# Altium PCB CH634X-USB-Hub.PcbDoc
Units mil, origin at the board's own origin, x right, y up, seen from the top; angles counter-clockwise.
Board outline 669 x 2204 mil, 2 copper layers (Top Layer, Bottom Layer); 90 components, 98 nets, 333 pads, 0 vias.
Unrouted connection lines stored in the file: 230.
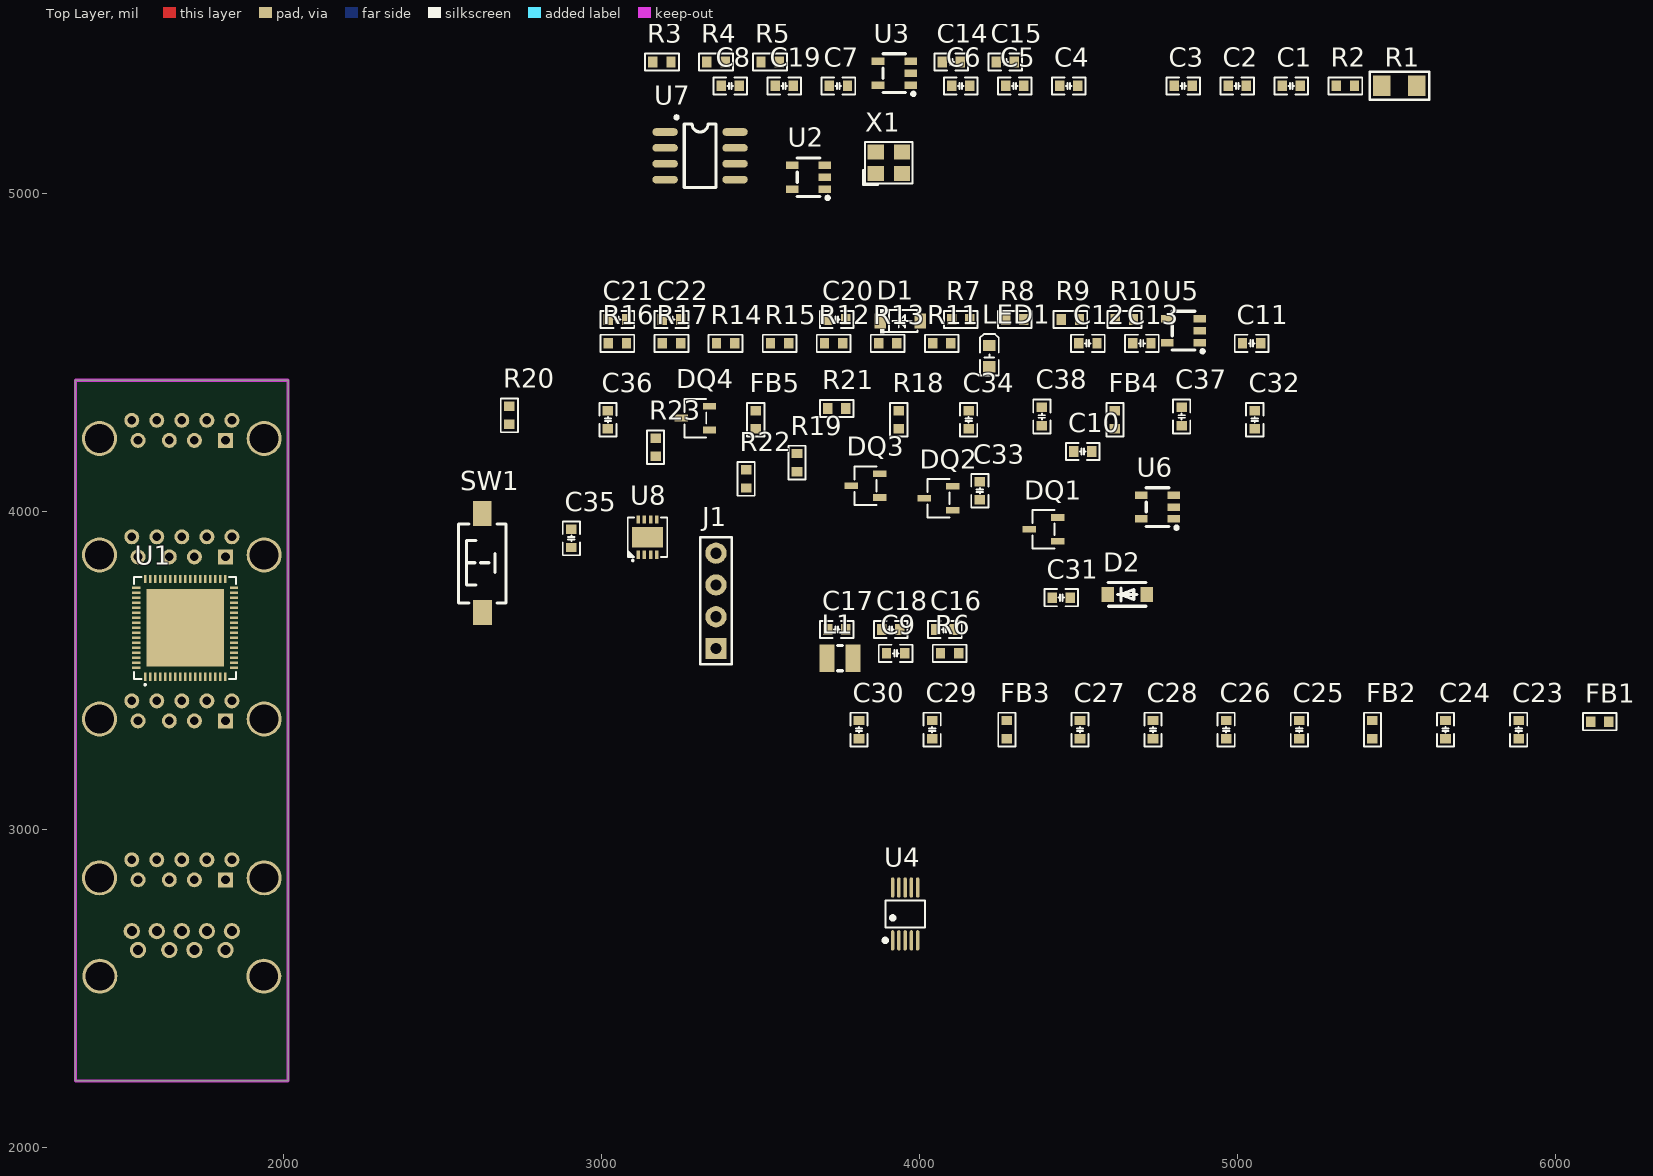
[diagram p0: Top Layer view]
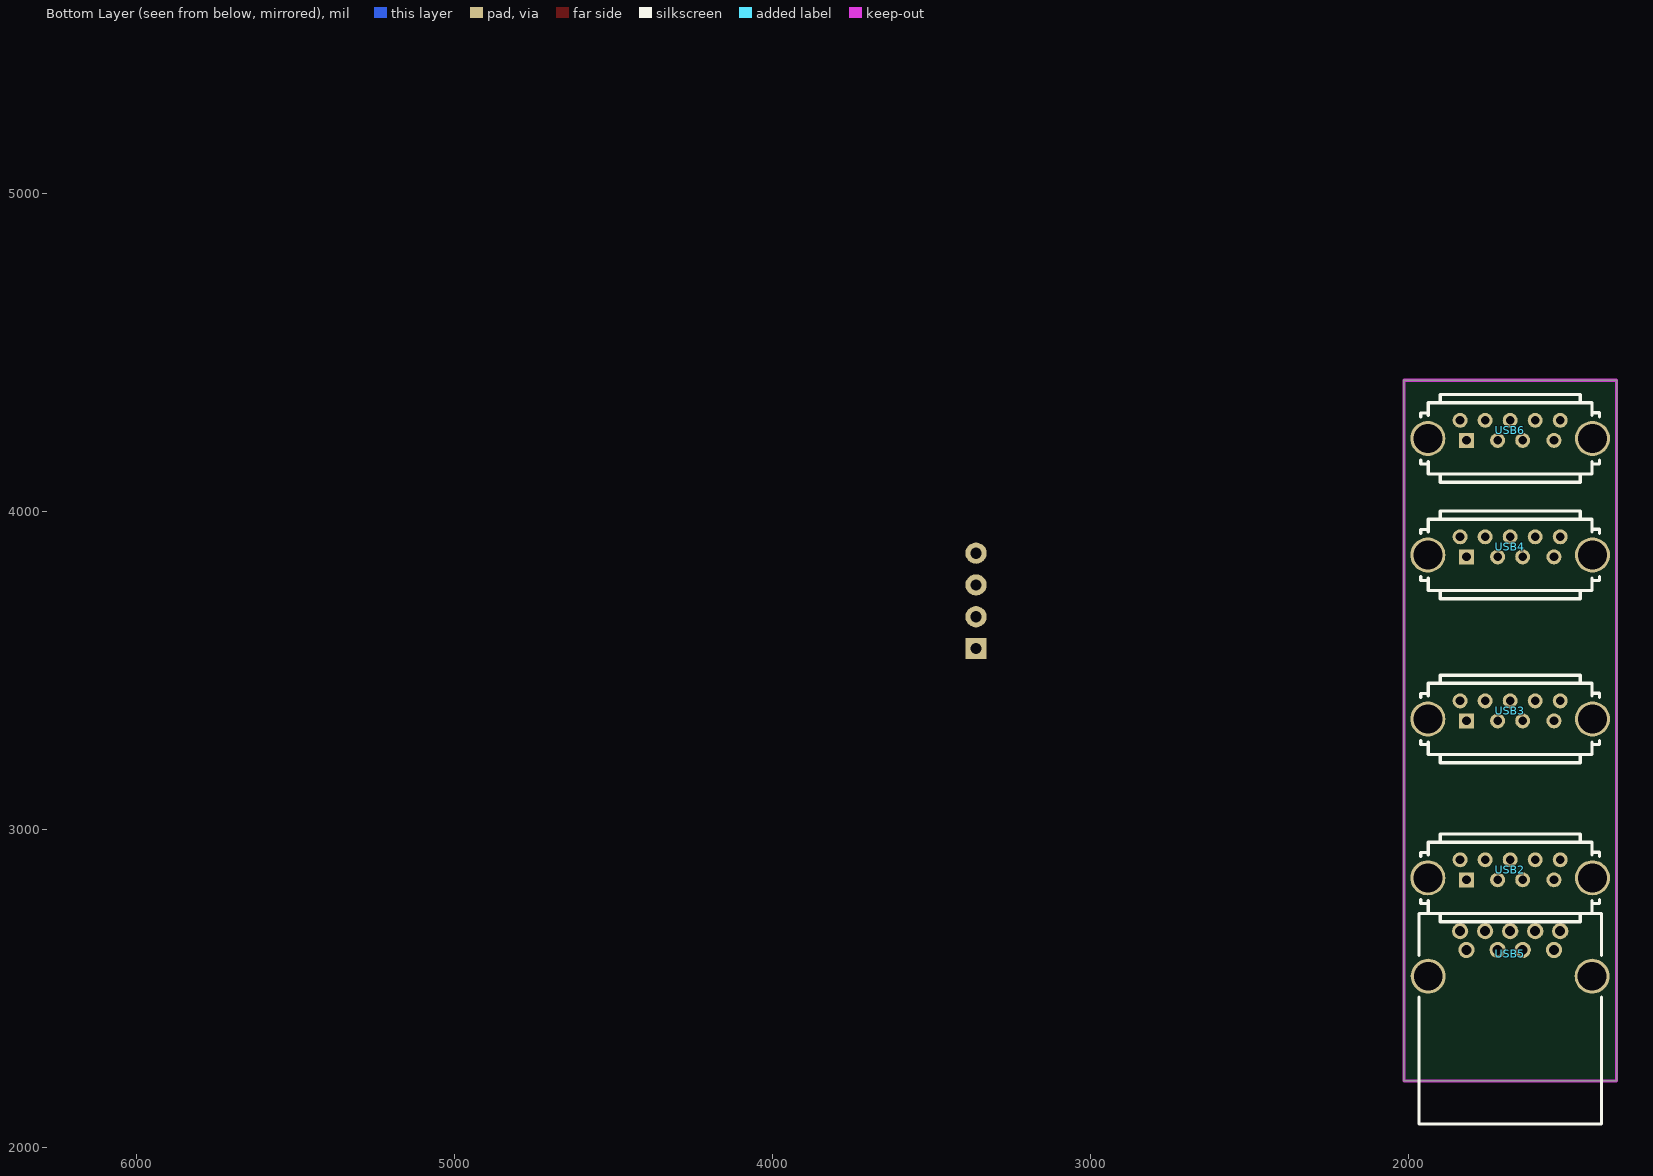
[diagram p1: Bottom Layer view, seen from below]

## Layer stack, top to bottom
Top Solder: solder mask 0.4, Solder Resist, Dk 3.5
Top Layer: signal copper 1.4
Dielectric 1: dielectric 12.6, FR-4, Dk 4.8
Bottom Layer: signal copper 1.4
Bottom Solder: solder mask 0.4, Solder Resist, Dk 3.5

## Board outline
1345,2210 2014,2210 2014,4414 1345,4414

## Design rules (kind name [scope] priority, off if disabled: settings)
Clearance [All] p1: gap=10 ignorepadtopadclearanceinfootprint=TRUE except(0: Arc-Hole Track-Hole SMDPad-Hole THPad-Hole Via-Hole Fill-Hole Poly-Hole Region-Hole Text-Hole)
PolygonConnect [All] p1: connectstyle=Relief reliefconductorwidth=10 reliefentries=4 polygonreliefangle="90 Angle" airgapwidth=10
RoutingVias [All] p1: holewidth=28 width=50 viastyle="Through Hole" minholewidth=28 minwidth=50 maxholewidth=28 maxwidth=50
SolderMaskExpansion [All] p1: expansion=4 istentingtop=FALSE
Width [All] p1: maxlimit=10 minlimit=10 preferedwidth=10
30 further rules are at their usual default settings.

## Components (designator, comment, footprint, x,y, rotation, side; value= is the part's Value field where it differs from the comment)
C1 "100nF 10% 50V" C0603_L 5170,5340 r0 top
C2 "100nF 10% 50V" C0603_L 5000,5340 r0 top
C3 "100nF 10% 50V" C0603_L 4830,5340 r0 top
C4 "100nF 10% 50V" C0603_L 4470,5340 r0 top
C5 "100nF 10% 50V" C0603_L 4300,5340 r0 top
C6 "20pF 5% 50V" C0603_L 4130,5340 r0 top
C7 "20pF 5% 50V" C0603_L 3745,5340 r0 top
C8 "1uF 10% 6.3V" C0603_L 3405,5340 r0 top
C9 "10uF 10% 6.3V" C0603_L 3925,3555 r0 top
C10 "100nF 10% 50V" C0603_L 4513.54,4190 r0 top
C11 "10uF 10% 6.3V" C0603_L 5045,4530 r0 top
C12 "100nF 10% 50V" C0603_L 4530,4530 r0 top
C13 "10uF 10% 6.3V" C0603_L 4700,4530 r0 top
C14 "10uF 10% 6.3V" C0603_L 4100,5415 r0 top
C15 "10uF 10% 6.3V" C0603_L 4270,5415 r0 top
C16 "10uF 10% 6.3V" C0603_L 4080,3630 r0 top
C17 "10uF 10% 6.3V" C0603_L 3740,3630 r0 top
C18 "10uF 10% 6.3V" C0603_L 3910,3630 r0 top
C19 "100nF 10% 50V" C0603_L 3575,5340 r0 top
C20 "100nF 10% 50V" C0603_L 3740,4605 r0 top
C21 "10uF 10% 6.3V" C0603_L 3050,4605 r0 top
C22 "100nF 10% 50V" C0603_L 3220,4605 r0 top
C23 "100nF 10% 50V" C0603_L 5885,3315 r90 top
C24 "100nF 10% 50V" C0603_L 5655,3315 r90 top
C25 "100nF 10% 50V" C0603_L 5195,3315 r90 top
C26 "100nF 10% 50V" C0603_L 4965,3315 r90 top
C27 "10uF 10% 6.3V" C0603_L 4505,3315 r90 top
C28 "10uF 10% 6.3V" C0603_L 4735,3315 r90 top
C29 "100nF 10% 50V" C0603_L 4040,3315 r90 top
C30 "100nF 10% 50V" C0603_L 3810,3315 r90 top
C31 "10uF 10% 6.3V" C0603_L 4446.46,3730 r0 top
C32 "10uF 10% 6.3V" C0603_L 5055,4290 r90 top
C33 "100nF 10% 50V" C0603_L 4190,4066.46 r90 top
C34 "100nF 10% 50V" C0603_L 4155,4290 r90 top
C35 "100nF 10% 50V" C0603_L 2905,3916.46 r90 top
C36 "100nF 10% 50V" C0603_L 3020,4290 r90 top
C37 "100nF 10% 50V" C0603_L 4825,4300 r90 top
C38 "100nF 10% 50V" C0603_L 4385,4300 r90 top
D1 "SM4007PL" SOD-123FL 3940,4600 r0 top
D2 "SMFJ6.0CA" SOD-123F_L2.8-W1.8-LS3.7-RD 4653.98,3740 r0 top
DQ1 "S8050" SOT-23-3_L2.9-W1.6-P1.90-LS2.8-BR 4390,3945 r0 top
DQ2 "S8050" SOT-23-3_L2.9-W1.6-P1.90-LS2.8-BR 4060.32,4042.6 r0 top
DQ3 "S8050" SOT-23-3_L2.9-W1.6-P1.90-LS2.8-BR 3830.32,4082.4 r0 top
DQ4 "S8050" SOT-23-3_L2.9-W1.6-P1.90-LS2.8-BR 3295,4295 r0 top
FB1 "120R@100MHz" FB0603 6140,3340 r0 top
FB2 "120R@100MHz" FB0603 5425,3315 r90 top
FB3 "120R@100MHz" FB0603 4275,3315 r90 top
FB4 "120R@100MHz" FB0603 4615,4290 r90 top
FB5 "120R@100MHz" FB0603 3485,4290 r90 top
J1 "2.54mm 4P" HDR2.54-LI-4P 3360,3720 r90 top
L1 "ftc252012s100mbca" IND-SMD_L2.5-W2.0 3750,3540 r0 top value=10uH
LED1 "蓝色" LED0603-FD 4220,4490 r90 top
R1 "33mR 1%" R1206_L 5510,5340 r0 top
R2 "5.1k 5%" R0603_L 5340,5340 r0 top
R3 "6.8k 1%" R0603_L 3190,5415 r0 top
R4 "5.1k 5%" R0603_L 3360,5415 r0 top
R5 "6.8k 1%" R0603_L 3530,5415 r0 top
R6 "5.1k 5%" R0603_L 4095,3555 r0 top
R7 "6.8k 1%" R0603_L 4130,4605 r0 top
R8 "NC" R0603_L 4300,4605 r0 top
R9 "6.8k 1%" R0603_L 4475,4605 r0 top
R10 "5.1k 5%" R0603_L 4645,4605 r0 top
R11 "10k 5%" R0603_L 4070,4530 r0 top
R12 "5.1k 5%" R0603_L 3730,4530 r0 top
R13 "5.1k 5%" R0603_L 3900,4530 r0 top
R14 "NC" R0603_L 3390,4530 r0 top
R15 "5.1k 5%" R0603_L 3560,4530 r0 top
R16 "5.1k 5%" R0603_L 3050,4530 r0 top
R17 "5.1k 5%" R0603_L 3220,4530 r0 top
R18 "0R 5%" R0603_L 3935,4290 r90 top
R19 "0R 5%" R0603_L 3615,4155 r90 top
R20 "NC" R0603_L 2710,4303.54 r90 top
R21 "5.1k 5%" R0603_L 3740,4325 r0 top
R22 "5.1k 5%" R0603_L 3455,4103.54 r90 top
R23 "5.1k 5%" R0603_L 3170,4203.54 r90 top
SW1 "ts-1088-ar02016" "SW SMD-3*6*2.5" 2625,3840 r90 top
U1 "ch634x_c48985831" QFN-68_L8.0-W8.0-P0.40-BL-EP6.2 1690,3635 r0 top
U2 "MT9700" SOT-23-5_L3.0-W1.7-P0.95-LS2.8-BR 3650.32,5052.6 r0 top
U3 "MT9700" SOT-23-5_L3.0-W1.7-P0.95-LS2.8-BR 3920,5380 r0 top
U4 "ina226aidgsr" MSOP-10_L3.0-W3.0-P0.50-LS5.0-BL 3955,2735 r0 top
U5 "MT9700" SOT-23-5_L3.0-W1.7-P0.95-LS2.8-BR 4830,4570 r0 top
U6 "MT9700" SOT-23-5_L3.0-W1.7-P0.95-LS2.8-BR 4747.94,4015 r0 top
U7 "CH340N" SOP8 3201,5196 r0 top
U8 "stc8g1k08-36i-dfn8" DFN-8_L3.0-W3.0-P0.50-BL-EP 3144.5,3920.4 r0 top
USB2 "hc-usb3.0-l130-wj" USB-A-TH_USB-A-TH_HC-USB3.0-L115-WJ 1679.5,2874 r180 bottom locked
USB3 "hc-usb3.0-l130-wj" USB-A-TH_USB-A-TH_HC-USB3.0-L115-WJ 1679.5,3374 r180 bottom locked
USB4 "hc-usb3.0-l130-wj" USB-A-TH_USB-A-TH_HC-USB3.0-L115-WJ 1679.5,3890 r180 bottom locked
USB5 "hc-usb3.0-l168-wj" USB-3.0-A-TH_HC-USB3.0-L168-WJ 1679.5,2610 r180 bottom locked
USB6 "hc-usb3.0-l130-wj" USB-A-TH_USB-A-TH_HC-USB3.0-L115-WJ 1679.5,4256.5 r180 bottom locked
X1 "24MHz/10ppm" OSC-3225-4P 3903.66,5098.46 r0 top

## Footprints (in the part's own frame and the unit in brackets; to place one, negate y for a bottom-side part, rotate by r counter-clockwise, add the part's x,y. Pads: shape width x height; smd on the part's side, far side on the other; paste and mask are expansions set on the pad)
C0603_L [mm] "贴片MLCC电容"
  rect 0.75x0.85 smd: 1(-0.725,0) 2(0.725,0)
  silkscreen extent -1.35,-0.69 1.35,0.69, body extent -0.8,-0.4 0.8,0.4, height 0.8
DFN-8_L3.0-W3.0-P0.50-BL-EP [mil]
  rect 11x26.2 smd: 1(-29.5,-55.4) 2(-9.8,-55.4) 3(9.8,-55.4) 4(29.5,-55.4) 5(29.5,55.4) 6(9.8,55.4) 7(-9.8,55.4) 8(-29.5,55.4)
  rect 96.5x65 smd: 9(0,0)
  silkscreen extent -62,-76 62,62
FB0603 [mm] "0603贴片磁珠"
  rect 0.75x0.85 smd: 1(-0.725,0) 2(0.725,0)
  silkscreen extent -1.35,-0.69 1.35,0.69, body extent -0.8,-0.4 0.8,0.4, height 0.8
HDR2.54-LI-4P [mm] "排针，4脚"
  rect 1.7x1.7 hole 0.9: 1(-3.81,0)
  round 1.7 hole 0.9: 2(-1.27,0) 3(1.27,0) 4(3.81,0)
  silkscreen extent -5.08,-1.27 5.08,1.27, body extent -5.08,-1.27 5.08,1.27, height 2.54
IND-SMD_L2.5-W2.0 [mil]
  rect 47.2x86.6 smd: 1(40.5,0) 2(-40.5,0)
  silkscreen extent -8,-40 8,40
LED0603-FD [mm]
  rect 0.9x1 smd: 1(-0.85,0) 2(0.85,0)
  silkscreen extent -1.55,-0.75 1.75,0.75
MSOP-10_L3.0-W3.0-P0.50-LS5.0-BL [mil]
  oval 11x63.8 smd: 1(-39.4,-83.1) 2(-19.7,-83.1) 3(0,-83.1) 4(19.7,-83.1) 5(39.4,-83.1) 6(39.4,83) 7(19.7,83) 8(0,83) 9(-19.7,83) 10(-39.4,83)
  silkscreen extent -69,-89 62,42
OSC-3225-4P [mm] "3.2*2.5*0.7mm(长宽高)                             淘宝ID:黄晶宝石"
  rect 1.3x1.2 smd: 1(-1.05,-0.85) 2(1.05,-0.85) 3(1.05,0.85) 4(-1.05,0.85)
  silkscreen extent -2.03,-1.75 1.91,1.65, body extent -1.6,-1.25 1.6,1.25, height 0.7
QFN-68_L8.0-W8.0-P0.40-BL-EP6.2 [mil]
  rect 7.9x26.2 smd paste-3937 mask+2: 1(-125.9,-153.9) 2(-110.2,-153.9) 3(-94.5,-153.9) 4(-78.7,-153.9) 5(-63,-153.9) 6(-47.2,-153.9) 7(-31.5,-153.9) 8(-15.7,-153.9) 9(0,-153.9) 10(15.8,-153.9) 11(31.5,-153.9) 12(47.3,-153.9) 13(63,-153.9) 14(78.8,-153.9) 15(94.5,-153.9) 16(110.3,-153.9) 17(126,-153.9) 35(126,153.8) 36(110.3,153.8) 37(94.5,153.8) 38(78.8,153.8) 39(63,153.8) 40(47.3,153.8) 41(31.5,153.8) 42(15.8,153.8) 43(0,153.8) 44(-15.7,153.8) 45(-31.5,153.8) 46(-47.2,153.8) 47(-63,153.8) 48(-78.7,153.8) 49(-94.5,153.8) 50(-110.2,153.8) 51(-125.9,153.8)
  rect 26.2x7.9 smd paste-3937 mask+2: 18(153.9,-126) 19(153.9,-110.2) 20(153.9,-94.5) 21(153.9,-78.7) 22(153.9,-63) 23(153.9,-47.2) 24(153.9,-31.5) 25(153.9,-15.8) 26(153.9,0) 27(153.9,15.7) 28(153.9,31.5) 29(153.9,47.2) 30(153.9,63) 31(153.9,78.7) 32(153.9,94.5) 33(153.9,110.2) 34(153.9,126) 52(-153.8,126) 53(-153.8,110.2) 54(-153.8,94.5) 55(-153.8,78.7) 56(-153.8,63) 57(-153.8,47.2) 58(-153.8,31.5) 59(-153.8,15.7) 60(-153.8,0) 61(-153.8,-15.8) 62(-153.8,-31.5) 63(-153.8,-47.2) 64(-153.8,-63) 65(-153.8,-78.7) 66(-153.8,-94.5) 67(-153.8,-110.2) 68(-153.8,-126)
  rect 244.1x244.1 smd paste-3937 mask+2: 69(0,0)
  silkscreen extent -160,-182 160,160
R0603_L [mm] "1/10W贴片电阻"
  rect 0.75x0.85 smd: 1(-0.725,0) 2(0.725,0)
  silkscreen extent -1.35,-0.69 1.35,0.69, body extent -0.8,-0.4 0.8,0.4, height 0.4
R1206_L [mm] "1/4W贴片电阻"
  rect 1.4x1.65 smd: 1(-1.4,0) 2(1.4,0)
  silkscreen extent -2.39,-1.12 2.39,1.12, body extent -1.6,-0.8 1.6,0.8, height 0.56
SOD-123F_L2.8-W1.8-LS3.7-RD [mm]
  rect 1x1.2 smd: 1(-1.55,0) 2(1.55,0)
  silkscreen extent -1.52,-0.93 1.49,0.95, body extent -1.85,-0.8 1.85,0.8, height 1.2
SOD-123FL [mm]
  rect 0.93x1.2 smd: 1(-1.6,0) 2(1.6,0)
  silkscreen extent -1.6,-0.95 1.38,0.95
SOP8 [mil] "联系卖家 免费查找封装"
  oval 80x24 smd: 1(-1,-1) 2(-1,-51) 3(-1,-101) 4(-1,-151) 5(219,-151) 6(219,-101) 7(219,-51) 8(219,-1)
  silkscreen extent 30,-176 159,50, body extent -12,-173 225,24, height 75
SOT-23-3_L2.9-W1.6-P1.90-LS2.8-BR [mm]
  rect 1.07x0.532 smd: 1(1.135,-0.95) 2(1.135,0.95) 3(-1.135,0)
  silkscreen extent -0.88,-1.54 0.88,1.54, body extent -1.37,-1.49 1.27,1.51, height 1.08
SOT-23-5_L3.0-W1.7-P0.95-LS2.8-BR [mm]
  rect 1x0.6 smd: 1(1.322,-0.95) 2(1.322,0) 3(1.322,0.95) 4(-1.278,0.95) 5(-1.278,-0.95)
  silkscreen extent -0.88,-1.78 1.67,1.55
"SW SMD-3*6*2.5" [mm] "3*6*2.5mm"
  rect 2x1.5 smd: 1(-3.996,-0.02) 2(3.937,0)
  silkscreen extent -3.21,-1.9 3.09,1.9, body extent -4,-1.75 4,1.75, height 2.59
USB-3.0-A-TH_HC-USB3.0-L168-WJ [mil]
  round 51.2 hole 31.5: 1(-137.8,11.8) 2(-39.4,11.8) 3(39.3,11.8) 4(137.8,11.8) 5(157.4,70.9) 6(78.7,70.9) 7(0,70.9) 8(-78.8,70.9) 9(-157.5,70.9)
  round 110 hole 90.6: 10(257.8,-70.9) 11(-257.9,-70.9)
  silkscreen extent -287,-535 287,126
USB-A-TH_USB-A-TH_HC-USB3.0-L115-WJ [mil]
  rect 47.2x47.2 hole 27.6: 1(-137.8,-31.5)
  round 47.2 hole 27.6: 2(-39.4,-31.5) 3(39.3,-31.5) 4(137.7,-31.5) 5(157.4,31.5) 6(78.7,31.5) 7(0,31.5) 8(-78.8,31.5) 9(-157.5,31.5)
  round 110 hole 90.6: 10(-258.9,-25.6) 11(258.8,-25.6)
  silkscreen extent -282,-163 281,112

## Part data
C1 C2 C3 C4 C5 C6 C7 C8 C9 C10 C11 C12 C13 C14 C15 C16 C17 C18 C19 C20 C21 C22 C23 C24 C25 C26 C27 C28 C29 C30 C31 C32 C33 C34 C35 C36 C37 C38: library part C, "贴片电容", BOM名称=无极性贴片电容, 优秀评价可免费更新=联系淘宝ID：黄晶宝石，获取更新版封装库, 卖家免费技术支持，联系售后=唯一出售店铺网址https://shop463601444.taobao.com, 本封装库来自淘宝卖家 ID：黄晶宝石=其他店铺购入均为盗版，请立即申请退款
D1: "贴片二极管", BOM_JLCPCB Part Class="Basic Part", BOM_Manufacturer=MDD, BOM_Manufacturer Part=SM4007PL, BOM_Supplier=LCSC, BOM_Supplier Part=C64898, spicePre=D, spiceSymbolName=SM4007PL
D2: library part SMFJ6.5CA, "瞬态抑制二极管", Breakdown Voltage (Max)=7.98V, Breakdown Voltage (Min)=7.22V, JLCPCB Part Class="Extended Part", LCSC Part Name="双向 6.5V 200W", Manufacturer=BORN伯恩半导体, Maximum Clamping Voltage=11.2V, Peak Pulse Current (Ipp)@10/1000μs=17.9A, Peak Pulse Power Dissipation (Ppp)@10/1000μs=200W, Reverse Leakage Current (Ir)=250μA, Reverse Stand-Off Voltage (Vrwm)=6.5V, Add into BOM=yes, Convert to PCB=yes, DataSheet=https://atta.szlcsc.com/upload/public/pdf/source/20181211/C152064_2CFB5B95395FB4F205D55C4FF132895F.pdf, Device=SMFJ6.5CA, Manufacturer Part=SMFJ6.5CA, Polarity=双向, Supplier=LCSC, Supplier Footprint=SOD-123FL, Supplier Part=C2842363, Symbol=SMFJ6.5CA
DQ1 DQ2 DQ3 DQ4: "贴片三极管", BOM_JLCPCB Part Class="Extended Part", BOM_Manufacturer=Hottech, BOM_Manufacturer Part=S8050, BOM_Supplier=LCSC, BOM_Supplier Part=C181158, Contributor=LCSC, spicePre=Q, spiceSymbolName=S8050_C181158
FB1 FB2 FB3 FB4 FB5: library part FB, "贴片磁珠", BOM名称=直插磁珠, 联系下单店铺卖家 免费帮你查找封装="联系下单店铺卖家 免费技术支持"
J1: library part CON4, "排母"
L1: "电感值:10uH;精度:±20%;额定电流:1.2A;饱和电流(Isat):1.6A;类型:一体成型电感;", DC Resistance (DCR)=330mΩ, JLCPCB Part Class="Extended Part", LCSC Part Name="10uH ±20% 1.6A", Manufacturer=cjiang(长江微电), ManufacturerPart=FTC252012S100MBCA, Rated Current=1.2A, Saturation Current (Isat)=1.6A, Tolerance=±20%, AddInBom=yes, ConvertToPcb=yes, DataSheet=https://atta.szlcsc.com/upload/public/pdf/source/20230602/8FFEDA9C0247A92A0D4B67554BFE4091.pdf, FootprintName=IND-SMD_L2.5-W2.0, ModelId=85d117b4abb34d9087271edcd9ba0330, ModelName=IND-SMD_L2.5-W2.0-H1.2, ModelTransform=99.2124,78.74,0,0,0,0,0,0,0, Supplier=LCSC, Supplier Footprint=SMD,2x2.5mm, SupplierPart=C5832376, Symbol=FTC252012S100MBCA, Type=一体成型电感
LED1: library part LED, "贴片LED", BOM名称=贴片LED, 封装库来自淘宝卖家：黄晶宝石=其他店铺购入均为盗版封装库，无更新权益，请立即申请退款，本店现金奖励200~1000元
R1: library part R, "FRM121WFR033TM", BOM名称=贴片电阻, 优秀评价可免费更新=联系淘宝ID：黄晶宝石，获取更新版封装库, 卖家免费技术支持，联系售后=唯一出售店铺网址https://shop463601444.taobao.com, 本封装库来自淘宝卖家 ID：黄晶宝石=其他店铺购入均为盗版，请立即申请退款
R2 R3 R4 R5 R6 R7 R8 R9 R10 R11 R12 R13 R14 R15 R16 R17 R18 R19 R20 R21 R22 R23: library part R, "贴片电阻", BOM名称=贴片电阻, 优秀评价可免费更新=联系淘宝ID：黄晶宝石，获取更新版封装库, 卖家免费技术支持，联系售后=唯一出售店铺网址https://shop463601444.taobao.com, 本封装库来自淘宝卖家 ID：黄晶宝石=其他店铺购入均为盗版，请立即申请退款
SW1: "电路结构:单刀单掷;按钮形状:圆形按钮;作用力:1.6N;安装方式:立贴;开关长度:3.9mm;开关宽度:3mm;开关高度:2mm;带支架:不带支架;触点电流:50mA;额定电压:12V;带灯:-;工作寿命:10万次;", Actuator/Cap Color=黑色, Contact Current=50mA, IP Rating=-, JLCPCB Part Class="Basic Part", LCSC Part Name="3.9*3*2mm 立贴 轻触开关", Manufacturer=XUNPU(讯普), ManufacturerPart=TS-1088-AR02016, Operating Force=1.6N, operating temperature=-30℃~+80℃, Voltage Rating=12V, Actuator Style=圆形按钮, AddInBom=yes, Circuit=单刀单掷, ConvertToPcb=yes, DataSheet=https://item.szlcsc.com/datasheet/TS-1088-AR02016/763484.html, FootprintName=SW-SMD_L3.9-W3.0-P4.45, Length=3.9mm, Life=10万次, ModelId=b26698b69f274ffabef8a26c7d0e5dd1, ModelName=SW-SMD_L3.9-W2.9-H2.0-LS4.8, ModelTransform=188.976,114.174,0,0,0,0,0,0,0, Mounting Type=立贴, Supplier=LCSC, Supplier Footprint=SMD,4x3mm, SupplierPart=C720477, Switch Height=2mm, Symbol=TS-1088-AR02016, Termination Style=SMD接片, Width=3mm, with Bracket=不带支架, With Lamp=-
U1: "符合USB3.2 Gen1协议规范的4端口USB超高速HUB控制器芯片,CH634X内置两组Type-C双通道USB3.0 PHY和双PD PHY，原生支持Type-C正反插自适应，原生支持PDHUB、Type-C15W和PD100W快充。", JLCPCB Part Class="Extended Part", LCSC Part Name="4端口USB3.0 HUB控制器芯片", Manufacturer=WCH(南京沁恒), ManufacturerPart=CH634X, operating temperature=-40℃~+85℃, Voltage - Supply=3.3V；1.23V, AddInBom=yes, ConvertToPcb=yes, Data Rate=5Gbps, DataSheet=https://item.szlcsc.com/datasheet/CH634X/51318833.html, FootprintName=QFN-68_L8.0-W8.0-P0.40-BL-EP6.2, ModelId=72236333b5b14e54ba405b685275d4d4, ModelName=QFN-68_L8.0-W8.0-H0.8-P0.40-BL-EP, ModelTransform=314.96,314.96,0,90,0,0,0,0,0, Number of Channels=4, Supplier=LCSC, Supplier Footprint=QFN-68(8x8), SupplierPart=C48985831, Symbol=CH634X_C48985831, USB Protocol="USB 3.2"
U2 U3 U5 U6: JLCPCB Part Class="Extended Part", Manufacturer=西安航天民芯, Add into BOM=yes, Convert to PCB=yes, DataSheet=https://atta.szlcsc.com/upload/public/pdf/source/20170418/1492481333031.pdf, Device=MT9700, LCSC Part Name=MT9700, Manufacturer Part=MT9700, Supplier=LCSC, Supplier Footprint=SOT-23-5, Supplier Part=C89855, Symbol=mt9700
U4: "放大器数:-;共模电压:0V~36V;增益:-;带宽(-3db):-;", Differential Voltage=±40V, Ib - Input Bias Current=100pA, Input Offset Voltage Drift(Vos TC)=0.1uV/℃, JLCPCB Part Class="Extended Part", LCSC Part Name=高侧/低侧测量双向电流/功率监视器，具有I²C兼容接口, Manufacturer=TI(德州仪器), ManufacturerPart=INA226AIDGSR, operating temperature=-40℃~+125℃, Output Current=-, Quiescent Current=330uA, Vcm - Common Mode Voltage=0V~36V, Vos - Input Offset Voltage=2.5uV, AddInBom=yes, Bandwidth=-, Common Mode Rejection Ratio (CMRR)=140dB, ConvertToPcb=yes, DataSheet=https://www.ti.com/cn/lit/ds/symlink/ina226.pdf, Dual Supply=-, Features=可编程阈值告警；使能/关断功能；双向检测；数字输出接口；高边检测；低边检测；功率监控, FootprintName=MSOP-10_L3.0-W3.0-P0.50-LS5.0-BL, Gain=-, Gain Error=-, ModelId=b42a31f9e1fa4643bc7ea573b9bba7ed, ModelName=MSOP-10_L3.0-W3.0-H1.1-LS5.0-P0.50, ModelTransform=118.11,196.85,0,0,0,0,0,0,0, Noise density(eN)=-, Number of Channels=-, Single Supply=2.7V~5.5V, Slew Rate=-, Supplier=LCSC, Supplier Footprint=VSSOP-10, SupplierPart=C49851, Symbol=INA226AIDGSR
U8: "CPU内核:51系列;应用领域:-;", JLCPCB Part Class="Extended Part", LCSC Part Name=车规32位8051单片机, Manufacturer=STC, ManufacturerPart=STC8G1K08-36I-DFN8, Voltage - Supply=1.9V~5.5V, AddInBom=yes, Applications=-, ConvertToPcb=yes, CPU Core=51系列, DataSheet=https://item.szlcsc.com/datasheet/STC8G1K08-36I-DFN8/988330.html, FootprintName=DFN-8_L3.0-W3.0-P0.50-BL-EP, ModelId=528cefc8c0de4e9cb29dce66c37be9e3, ModelName=DFN-8_L3.0-W3.0-H1.0-P0.50, ModelTransform=118.8974,118.11,0,90,0,0,0,0,0, Number of I/O=6, Program Memory Type=FLASH, Program Storage Size=8KB, Supplier=LCSC, Supplier Footprint=DFN-8-EP(3x3), SupplierPart=C915662, Symbol=STC8G1K08-36I-DFN8
USB2 USB3 USB4 USB6: "连接器类型:Type-A;协议标准:USB 3.0;公母:母;安装方式:直插;触点数量:9P;端口数量:1;额定电流 - 电源:1.5A;工作温度:-25℃~+70℃;", Current Rating-Power=1.5A, Detection color=蓝色, JLCPCB Part Class="Extended Part", LCSC Part Name="蓝色 Type-A 母 直插 USB3.0 AF180度 13.0 弯脚卷边", Manufacturer=HC(虹成电子), ManufacturerPart=HC-USB3.0-L130-WJ, operating temperature=-25℃~+70℃, Voltage Rating=30V, AddInBom=yes, Center Height=-, Connect-Disconnect Life=1.5千次, Connector Type=Type-A, ConvertToPcb=yes, DataSheet=https://item.szlcsc.com/datasheet/HC-USB3.0-L130-WJ/8585400.html, FootprintName=USB-A-TH_USB-A-TH_HC-USB3.0-L115-WJ, Gender=母, Length=13mm, ModelId=458163262b3948bca63b5bb9db81e202, ModelName=USB-A-TH_USB-A-TH_HC-USB3.0-L115-WJ, ModelTransform=562.991,275.59,0,0,0,0,0,-25.709,-118.11, Mounting Type=直插, Number of Contacts=9P, Number of Ports=1, Protocol Standard="USB 3.0", Supplementary Features=-, Supplier=LCSC, Supplier Footprint=插件, SupplierPart=C7501859, Symbol=HC-USB3.0-L130-WJ
USB5: "连接器类型:Type-A;协议标准:USB 3.0;公母:母;安装方式:弯插;触点数量:9P;端口数量:1;额定电流 - 电源:1.5A;工作温度:-25℃~+70℃;", Current Rating-Power=1.5A, Detection color=蓝色, JLCPCB Part Class="Extended Part", LCSC Part Name="Type-A 母 弯插 USB3.0 A母90度 弯脚蓝色卷边 吸塑盒", Manufacturer=HC(虹成电子), ManufacturerPart=HC-USB3.0-L168-WJ, operating temperature=-25℃~+70℃, Voltage Rating=30V, AddInBom=yes, Center Height=-, Connect-Disconnect Life=1.5千次, Connector Type=Type-A, ConvertToPcb=yes, DataSheet=https://item.szlcsc.com/datasheet/HC-USB3.0-L168-WJ/8585392.html, FootprintName=USB-3.0-A-TH_HC-USB3.0-L168-WJ, Gender=母, Length=16.8mm, ModelId=26a7e2d5eb7443f086ff83cb617442dc, ModelName=USB-3.0-A-TH_HC-USB3.0-L168-WJ, ModelTransform=623.6208,661.46065,0,0,0,0,0.001,-204.759,-137.795, Mounting Type=弯插, Number of Contacts=9P, Number of Ports=1, Protocol Standard="USB 3.0", Supplementary Features=-, Supplier=LCSC, Supplier Footprint=弯插, SupplierPart=C7501851, Symbol=HC-USB3.0-L168-WJ
X1: library part OSC44M_5, "晶振"

## Nets (pads, with @x,y where several pads share a name; then routed paths per layer and width w, separated by ;. In a path a pad name is that pad's centre, name@x,y a point inside that pad or via, vN(x,y) a via of type N, cw(c..) or ccw(c..) an arc to the next point about the centre after c; other vN are vias at no path point)
1V2: C1.1 C2.1 C3.1 C4.1 C5.1 C8.1 C9.1 C37.1 C38.1 L1.1 U1.3 U1.12 U1.17 U1.22 U1.43 U1.52 U1.57 U1.66
3V3: C12.1 C13.2 R11.1 R12.1 R13.1 U1.35
CH634X_RST: U1.46 U8.1
GND: C1.2 C2.2 C3.2 C4.2 C5.2 C6.1 C7.1 C8.2 C9.2 C10.2 C11.1 C12.2 C13.1 C14.2 C15.2 C16.1 C17.2 C18.2 C19.2 C20.1 C21.1 C22.2 C27.2 C28.2 C31.2 C32.2 C37.2 C38.2 D2.1 DQ1.2 DQ2.2 DQ3.2 DQ4.2 FB1.1 FB2.1 FB3.1 FB4.1 FB5.1 J1.1 R3.1 R5.1 R6.2 R7.1 R8.2 R9.1 R14.2 R15.2 R20.2 SW1.2 U1.69 U2.2 U3.2 U4.1 U4.2 U4.7 U5.2 U6.2 U7.3 U8.4 U8.9 USB2.4 USB3.4 USB4.4 USB5.4 USB6.4 X1.2 X1.4
INA226_ALert: U1.27 U1.29 U1.31 U1.33 U4.3
INA226_SCL: R13.2 R19.1 U4.5 U8.7
INA226_SDA: R12.2 R18.1 U4.4 U8.8
NetC19_1: C19.1 U7.8
NetC23_2: C23.2 USB6.8
NetC24_2: C24.2 USB6.9
NetC25_2: C25.2 USB2.8
NetC26_2: C26.2 USB2.9
NetC29_2: C29.2 USB3.8
NetC30_2: C30.2 USB3.9
NetC33_2: C33.2 USB4.8
NetC34_2: C34.2 USB4.9
NetC35_2: C35.2 USB5.8
NetC36_2: C36.2 USB5.9
NetD1_1: D1.1 U7.6
NetD2_2: D2.2 R1.2 U4.10 USB6.1
NetDQ1_1: DQ1.1 R4.1
NetDQ1_3: DQ1.3 R2.1 U2.4
NetDQ2_1: DQ2.1 R16.1
NetDQ2_3: DQ2.3 R10.1 U3.4
NetDQ3_1: DQ3.1 R21.1
NetDQ3_3: DQ3.3 R17.1 U5.4
NetDQ4_1: DQ4.1 R23.1
NetDQ4_3: DQ4.3 R22.1 U6.4
NetFB1_2: FB1.2 USB6.7
NetFB2_2: FB2.2 USB2.7
NetFB3_2: FB3.2 USB3.7
NetFB4_2: FB4.2 USB4.7
NetFB5_2: FB5.2 USB5.7
NetL1_2: L1.2 U1.37
NetLED1_1: LED1.1 R11.2 R20.1
NetR3_2: R3.2 U2.3
NetR5_2: R5.2 U3.3
NetR7_2: R7.2 U5.3
NetR9_2: R9.2 U6.3
P1_CC1: R15.1 U1.42
P1_CC2: R14.1 U1.41
P1_HS_DM: U1.61 USB2.2
P1_HS_DP: U1.60 USB2.3
P1_SS_RXA: U1.55 USB2.5
P1_SS_RXB: U1.56 USB2.6
P1_SS_TXA: C25.1 U1.58
P1_SS_TXB: C26.1 U1.59
P1C_SS_RXA: U1.54
P1C_SS_RXB: U1.53
P1C_SS_TXA: U1.51
P1C_SS_TXB: U1.50
P2_CC1: R6.1 U1.40
P2_CC2: R8.1 U1.39
P2_HS_DM: U1.26 U7.2
P2_HS_DP: U1.25 U7.1
P2_SS_RXA: U1.19 USB5.5
P2_SS_RXB: U1.18 USB5.6
P2_SS_TXA: C35.1 U1.16
P2_SS_TXB: C36.1 U1.15
P2C_SS_RXA: U1.20
P2C_SS_RXB: U1.21
P2C_SS_TXA: U1.23
P2C_SS_TXB: U1.24
P3_HS_DM: U1.9 USB4.2
P3_HS_DP: U1.8 USB4.3
P3_SS_RXA: U1.14 USB4.5
P3_SS_RXB: U1.13 USB4.6
P3_SS_TXA: C33.1 U1.11
P3_SS_TXB: C34.1 U1.10
P4_HS_DM: U1.7 USB3.2
P4_HS_DP: U1.6 USB3.3
P4_SS_RXA: U1.5 USB3.5
P4_SS_RXB: U1.4 USB3.6
P4_SS_TXA: C29.1 U1.2
P4_SS_TXB: C30.1 U1.1
PWREN1: R4.2 U1.28
PWREN2: R23.2 U1.30
PWREN3: R21.2 U1.32
PWREN4: R16.2 U1.34
SMBCLK: R19.2 U1.45
SMBDAT: R18.2 U1.49
STC_RXD: D1.2 J1.3 U8.5
STC_TXD: J1.2 U7.7 U8.6
SUSP/PDHUB: LED1.2 U1.44
UP_HS_DM: U1.63 USB6.2
UP_HS_DP: U1.62 USB6.3
UP_PORT_SELECT: SW1.1 U8.3
UP_SS_RXA: U1.68 USB6.6
UP_SS_RXB: U1.67 USB6.5
UP_SS_TXA: C24.1 U1.65
UP_SS_TXB: C23.1 U1.64
Vusb: C10.1 C11.2 C16.2 C20.2 C21.2 C22.1 C27.1 C28.1 C31.1 C32.1 J1.4 R1.1 R2.2 R10.2 R17.2 R22.2 U1.36 U2.5 U3.5 U4.6 U4.8 U4.9 U5.5 U6.5 U7.5 U8.2
Vusb1: C14.1 U2.1 USB2.1
Vusb2: C15.1 U3.1 USB3.1
Vusb3: C17.1 U5.1 USB4.1
Vusb4: C18.1 U6.1 USB5.1
X24MI: C6.2 U1.48 X1.3
X24MO: C7.2 U1.47 X1.1
pads on no net: U1.38 U7.4 USB2.10 USB2.11 USB3.10 USB3.11 USB4.10 USB4.11 USB5.2 USB5.3 USB5.10 USB5.11 USB6.10 USB6.11

## Keep-outs
Keep-Out Layer:
  the board outline again, w10